# EAGLE board mems_quart_board_ics_40720 (EAGLE 7.6.0)
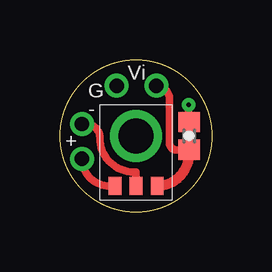
[diagram p0: board, top side]
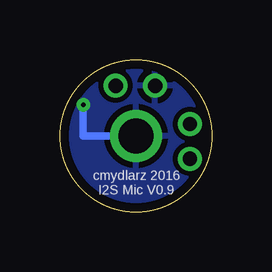
[diagram p1: board, bottom side, seen from below]

Size 6.35 x 6.35 mm. Coordinates in mm from the lower left corner, seen from the top.
Outline: circle at 3.17,3.17 radius 3.17
Copper layers (1*16): Top 0.0356mm / dielectric 1.5011mm / Bottom 0.0356mm
Design rules "oshpark-2layer *": minimum track width 6mil, minimum drill 13mil, track to track 6mil, track to pad 6mil, pad to pad 6mil, via to via 6mil, smd to smd 6mil, copper to edge 15mil, drill to drill 6mil, minimum pad ring 7mil, minimum via ring 7mil, stop-mask expansion 0mil, vias tented up to drill 20mil, thermal gap 10mil
Net classes: 0 default: clearance 0.205 mm

## Footprints (pad centres in the part's own frame; a part is rotated, then mirrored left to right if it is on the bottom)
0402-CAP = smd 0.85 x 0.9: 1 -0.58,0; 2 0.58,0
1X01_NO_SILK = drill 1.45 pad 2.14: 1 0,0
1X01NS-KIT = drill 0.6 pad 1: 1 0,0
 MEMS_ICS_40720 = smd 2.14 x 2.14: GND 1.5,2.68 | smd 0.53 x 0.73: VDD 2.385,0.595; VOUT+ 0.625,0.595; VOUT- 1.505,0.595

## Placement (x,y rotation side)
C1  [0402-CAP]  5.4,3.17 90 top
GND  [1X01_NO_SILK]  3.17,3.17 0 top
GND_IN  [1X01NS-KIT]  2.37,5.27 0 top
U$1  MEMS_ICS_40720  [ MEMS_ICS_40720]  1.67,0.5 0 top
VDD  [1X01NS-KIT]  4.02,5.27 0 top
VOUT+  [1X01NS-KIT]  0.92,2.23 180 top
VOUT-  [1X01NS-KIT]  0.92,3.67 0 top

## Library data of the parts
C1 = SparkFun-Capacitors; PROD_ID: CAP-12416
GND = CM-SparkFun-Connectors-large_hole
GND_IN VDD VOUT+ VOUT- = CM-SparkFun-Connectors
U$1 = mems_ICS_40720

## Nets
GND: C1.2 GND.1 GND_IN.1 U$1.GND
VDD: C1.1 U$1.VDD VDD.1
VOUT+: U$1.VOUT+ VOUT+.1
VOUT-: U$1.VOUT- VOUT-.1

## Tracks (layer width: path | path; a pad name or v marks a point on that pad's centre or on a via)
GND  (via drill 0.2)
  Top 0.305: C1.2 5.37,3.75 v5.37,4.48
  Bottom 0.305: v5.37,4.48 5.37,3.17 GND.1
  pour Bottom: 1.08,5.98 arc-28 1.58,6.27 arc13 2.27,6.58 arc-31 2.67,6.67 arc-7 3.87,6.58 arc-34 5.37,5.87 arc-25 6.37,4.48 arc-20 6.67,3.17 arc-27 6.48,2.08 arc-6 5.98,1.08 arc-31 5.17,0.27 arc-10 4.08,-0.23 arc-39 2.37,-0.23 arc-11 0.88,0.47 arc-29 0.58,0.77 arc-1 -0.12,1.98 arc-43 -0.33,3.37 arc-1 -0.03,4.58 arc-45
VDD
  Top 0.305: C1.1 4.85,2.59 arc-90 4.58,2.87 4.58,4.73 arc90 VDD.1
  Top 0.406: U$1.VDD arc90 5.4,2.45 C1.1
VOUT+
  Top 0.305: U$1.VOUT+ 2.06,1.09 arc-90 VOUT+.1
VOUT-
  Top 0.305: U$1.VOUT- 3.18,1.67 arc90 3.17,1.67 3.08,1.67 arc-90 1.67,3.08 arc103 VOUT-.1

## Text on the board
tNames: G | Vi | - | +
bNames: cmydlarz 2016 / I2S Mic V0.9